# Altium PCB Main Board.PcbDoc (part 2 of 2)
Units mm, origin at the board's own origin, x right, y up, seen from the top; angles counter-clockwise.
Board outline 100 x 75.8 mm, 4 copper layers (Top Layer, L1, L2, Bottom Layer), stack 1.743 mm thick; 166 components, 146 nets, 691 pads, 603 vias.
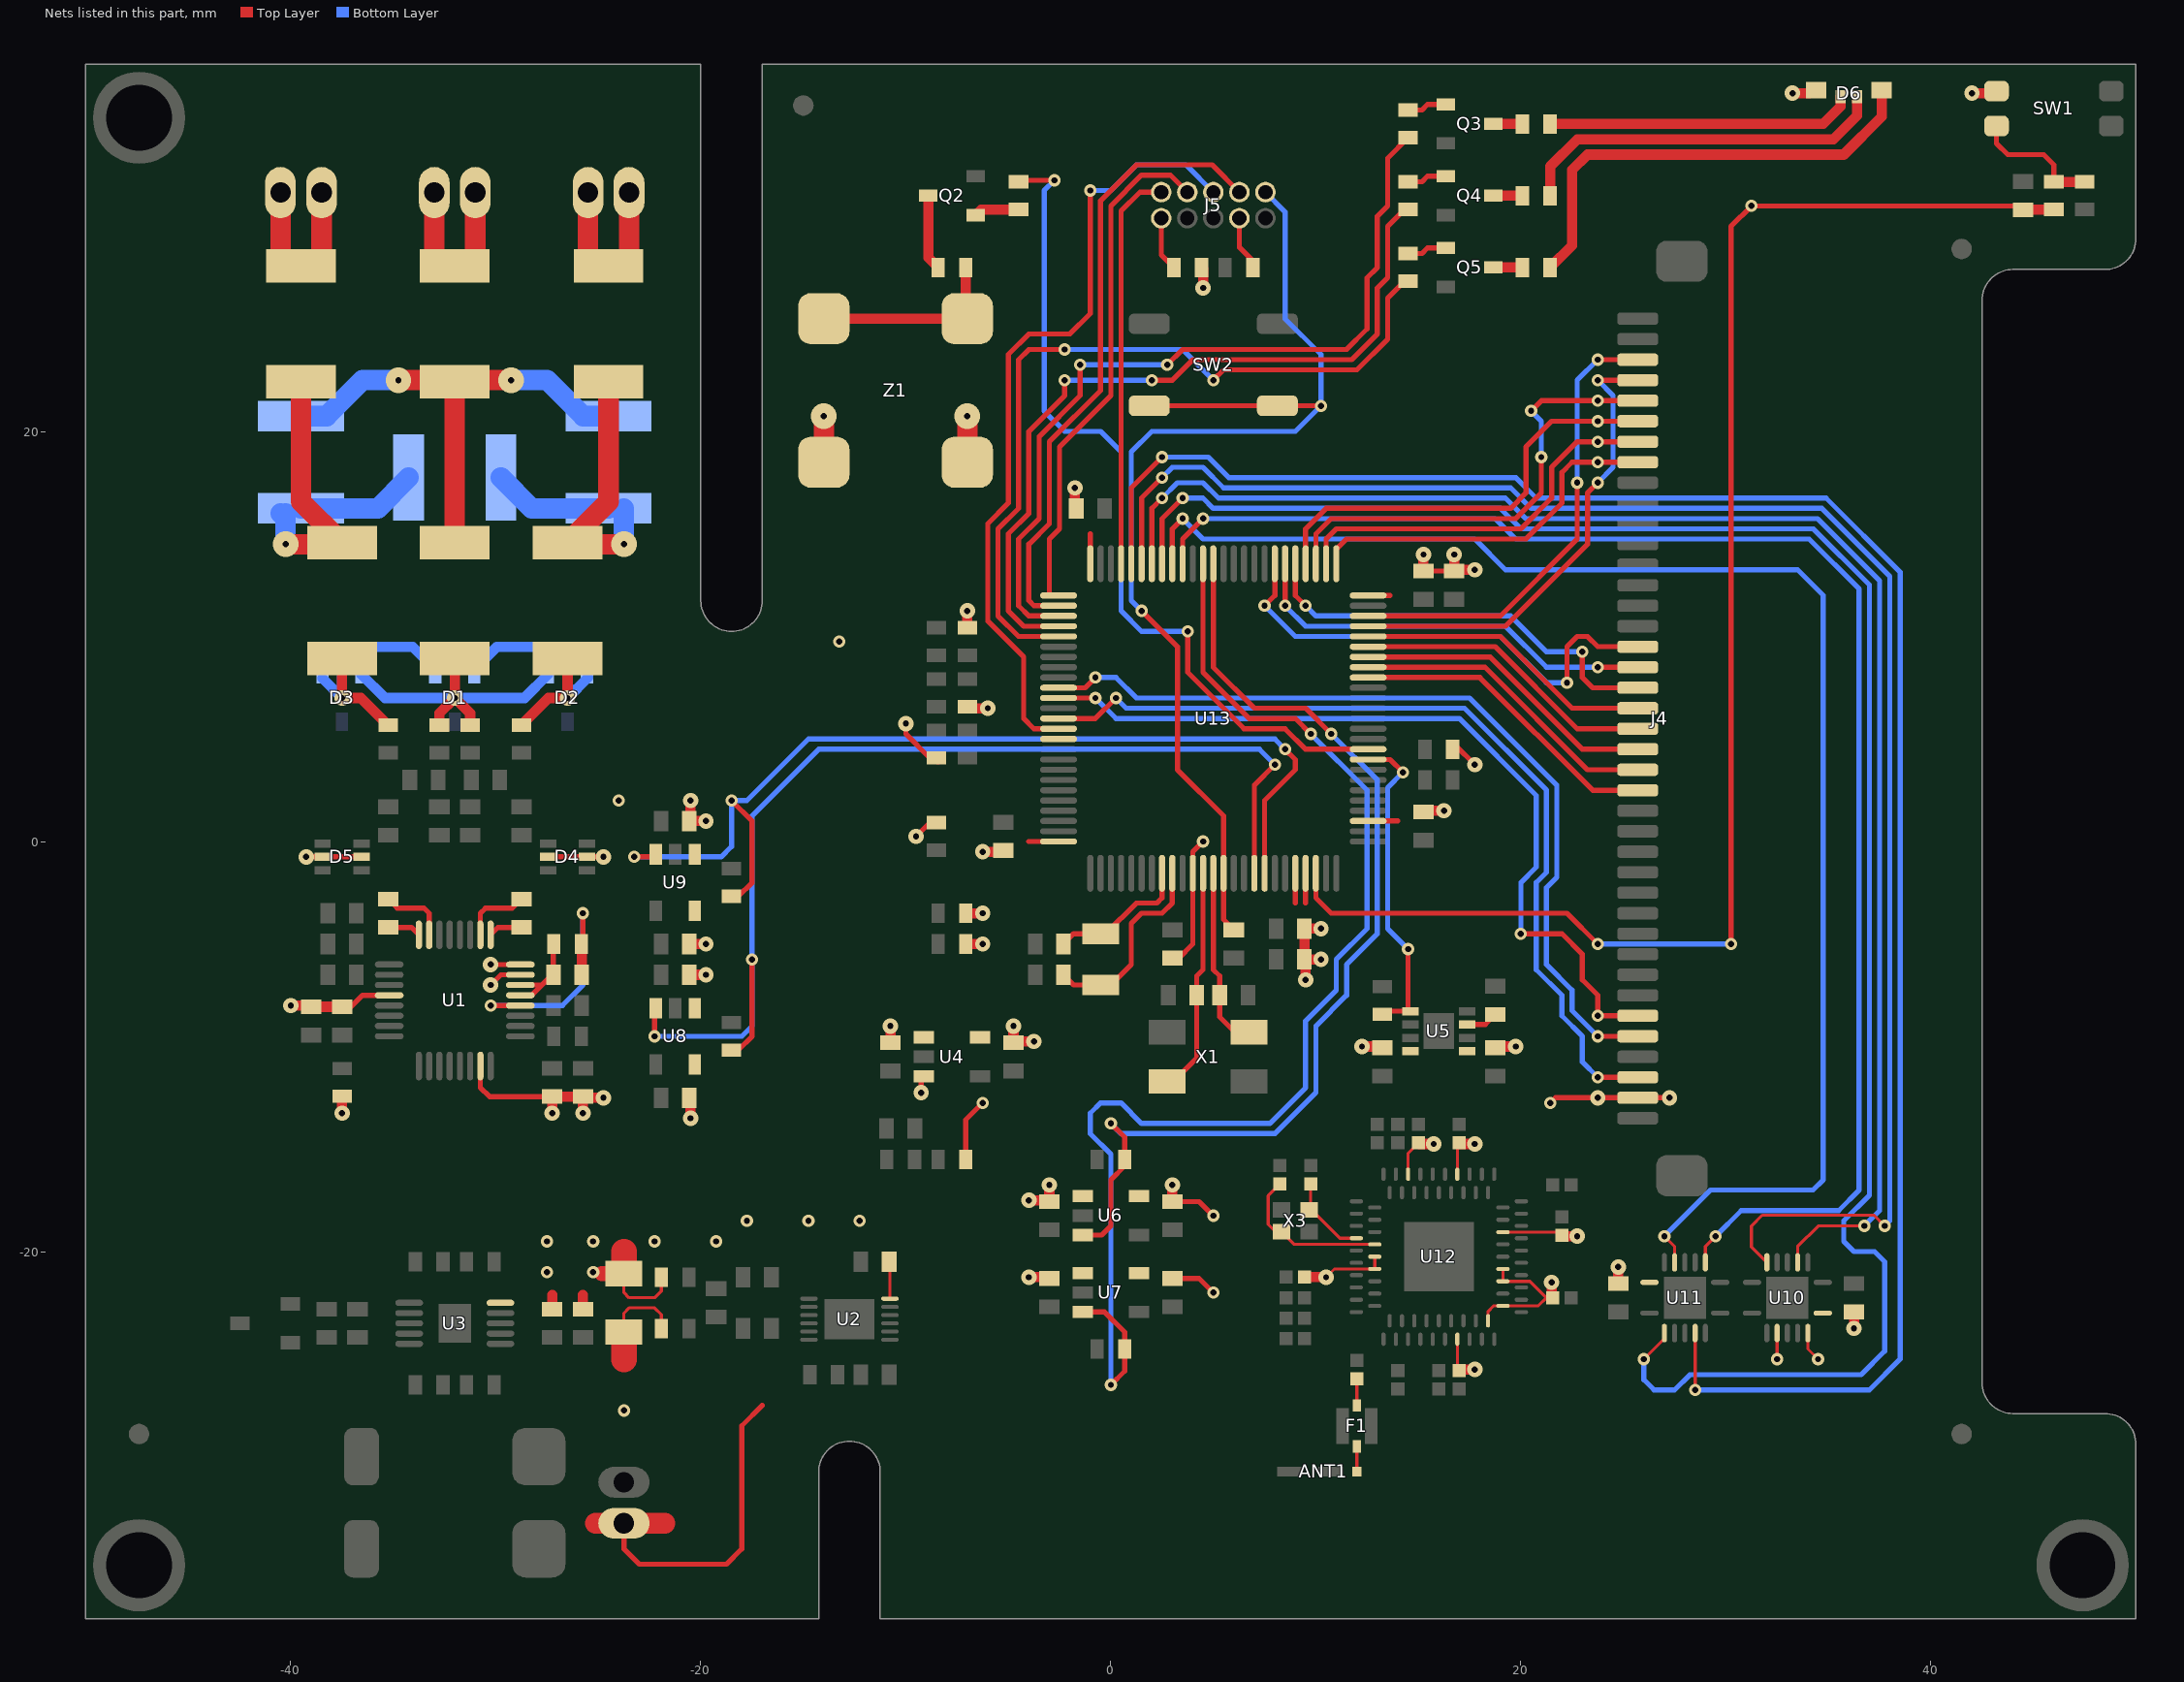
[diagram p4: the nets of this part, all layers, seen from the top]

## Via types
v1: diameter 0.6, hole 0.3, Top Layer to Bottom Layer, tented both sides, 307 vias
v2: diameter 0.75, hole 0.3, Top Layer to Bottom Layer, tented both sides, 137 vias
v3: diameter 0.6, hole 0.3, Top Layer to Bottom Layer, 105 vias
v4: diameter 0.6, hole 0.3, Top Layer to Bottom Layer, tented top, 40 vias
v5: diameter 1.25, hole 0.3, Top Layer to Bottom Layer, 4 vias
v6: diameter 0.75, hole 0.3, Top Layer to Bottom Layer, 3 vias
v7: diameter 1, hole 1, Top Layer to Bottom Layer, 2 vias
v8: diameter 0.75, hole 0.75, Top Layer to Bottom Layer, 2 vias
v9: diameter 1.25, hole 0.3, Top Layer to Bottom Layer, tented both sides, 2 vias
v10: diameter 0.6, hole 0.3, Top Layer to Bottom Layer, tented bottom, 1 vias

## Nets (pads, with @x,y where several pads share a name; then routed paths per layer and width w, separated by ;. In a path a pad name is that pad's centre, name@x,y a point inside that pad or via, vN(x,y) a via of type N, cw(c..) or ccw(c..) an arc to the next point about the centre after c; other vN are vias at no path point) (continued)
FSMC_D8: J4.24 U13.42 | length 15.4
  Top Layer w0.25: U13.42@12.55,8 18,8 23.5,2.5 J4.24@25.7,2.5
FSMC_D9: J4.23 U13.43 | length 15.2
  Top Layer w0.25: U13.43@12.55,8.5 18.25,8.5 23.25,3.5 J4.23@25.7,3.5
FSMC_D10: J4.22 U13.44 | length 15
  Top Layer w0.25: U13.44@12.55,9 18.5,9 23,4.5 J4.22@25.7,4.5
FSMC_D11: J4.21 U13.45 | length 14.8
  Top Layer w0.25: U13.45@12.55,9.5 18.75,9.5 22.75,5.5 J4.21@25.7,5.5
FSMC_D12: J4.20 U13.46 | length 14.6
  Top Layer w0.25: U13.46@12.55,10 19,10 22.5,6.5 J4.20@25.7,6.5
FSMC_D13: J4.19 U13.55 | length 20.8
  Top Layer w0.25: U13.55@9,13.55 9,12 v4(9.5,11.5) ; v3(23,9.25) 23,8 23.5,7.5 J4.19@25.7,7.5
  Bottom Layer w0.25: v4(9.5,11.5) 10,11 19.5,11 21.25,9.25 v3(23,9.25)
FSMC_D14: J4.18 U13.56 | length 20.5
  Top Layer w0.25: v4(8.5,11.5) U13.56@8.5,13.55 ; v3(23.75,8.5) J4.18@25.7,8.5
  Bottom Layer w0.25: v4(8.5,11.5) 9.5,10.5 19.25,10.5 21.25,8.5 v3(23.75,8.5)
FSMC_D15: J4.17 U13.57 | length 24.2
  Top Layer w0.25: v4(7.5,11.5) 8,12 U13.57@8,13.55 ; v3(22.25,7.75) 22.25,9.5 22.75,10 23.25,10 23.75,9.5 J4.17@25.7,9.5
  Bottom Layer w0.25: v4(7.5,11.5) 9,10 19,10 21.25,7.75 v3(22.25,7.75)
FSMC_NE1: J4.38 U13.88 | length 43.5
  Top Layer w0.25: U13.88@-2.55,6 -0.75,6 v4(0.25,7) ; v3(23.75,-11.5) J4.38@25.7,-11.5
  Bottom Layer w0.25: v4(0.25,7) 0.75,6.5 17.25,6.5 21.25,2.5 21.25,-1.5 20.75,-2 20.75,-6.25 22,-7.5 22,-8.5 23,-9.5 23,-10.75 v3(23.75,-11.5)
FSMC_NOE: J4.36 U13.85 | length 42.1
  Top Layer w0.25: U13.85@-2.55,7.5 -1.25,7.5 v4(-0.75,8) ; v3(23.75,-9.5) J4.36@25.7,-9.5
  Bottom Layer w0.25: v4(-0.75,8) 0.25,8 1.25,7 17.5,7 21.75,2.75 21.75,-1.75 21.25,-2.25 21.25,-6 22.5,-7.25 22.5,-8.25 v3(23.75,-9.5)
FSMC_NWE: J4.35 U13.86 | length 41
  Top Layer w0.25: U13.86@-2.55,7 v4(-0.75,7) ; v1(20,-4.5) 22,-4.5 23,-5.5 23,-6.75 23.75,-7.5 v3(23.75,-8.5) J4.35@25.7,-8.5
  Bottom Layer w0.25: v4(-0.75,7) 0.25,6 17,6 20.75,2.25 20.75,-1.25 20,-2 v1(20,-4.5)
HCI_CTS: U11.5 U13.71 | length 95.9
  Top Layer w0.15: v3(28.5,-26.75) U11.5@28.5,-23.975
  Top Layer w0.25: U13.71@1,13.55 1,17.25 v3(2.5,18.75)
  Bottom Layer w0.25: v3(2.5,18.75) 4.75,18.75 5.75,17.75 19.75,17.75 20.75,16.75 34.889,16.75 38.5,13.139 38.5,-25.25 37,-26.75 v3(28.5,-26.75)
HCI_RTS: U10.6 U13.70 | length 83.3
  Top Layer w0.15: U10.6@32,-20.525 31.25,-19.775 31.25,-18.75 31.775,-18.225 37.225,-18.225 v3(37.75,-18.75)
  Top Layer w0.25: U13.70@1.5,13.55 1.5,16.75 v3(2.5,17.75)
  Bottom Layer w0.25: v3(2.5,17.75) 3,18.25 4.5,18.25 5.5,17.25 19.5,17.25 20.5,16.25 34.682,16.25 38,12.932 38,-18.5 v3(37.75,-18.75)
HCI_RX: U11.2 U13.68 | length 93.6
  Top Layer w0.15: v3(26,-25.25) 27,-24.25 U11.2@27,-23.975
  Top Layer w0.25: U13.68@2.5,13.55 2.5,15.75 v3(3.5,16.75)
  Bottom Layer w0.25: v3(3.5,16.75) 4.5,16.75 5,16.25 19,16.25 20,15.25 34.268,15.25 37,12.518 37,-17.25 35.75,-18.5 35.75,-19.5 36.25,-20 37.25,-20 37.75,-20.5 37.75,-24.853 36.603,-26 28.25,-26 27.5,-26.75 26.5,-26.75 26,-26.25 v3(26,-25.25)
HCI_TX: U10.3 U13.69 | length 76.9
  Top Layer w0.15: U10.3@33.5,-20.525 33.5,-19.75 34.5,-18.75 v3(36.75,-18.75)
  Top Layer w0.25: U13.69@2,13.55 2,16.25 v3(2.5,16.75)
  Bottom Layer w0.25: v3(2.5,16.75) 3.25,17.5 4.5,17.5 5.25,16.75 19.25,16.75 20.25,15.75 34.475,15.75 37.5,12.725 37.5,-18 v3(36.75,-18.75)
JTCK: J5.4 U13.76 | length 25.4
  Top Layer w0.25: U13.76@-2.55,12 -3,12 -3,14.75 -2.5,15.25 -2.5,19.25 0,21.75 0,31 1.5,32.5 2.9,32.5 J5.4@3.73,31.67
JTDI: J5.8 U13.77 | length 30.5
  Top Layer w0.25: U13.77@-2.55,11.5 -3.75,11.5 -4,11.75 -4,14.5 -3,15.5 -3,19.5 -0.5,22 -0.5,31.25 1.25,33 4.94,33 J5.8@6.27,31.67
JTDO: J5.6 U13.89 | length 38.7
  Top Layer w0.25: U13.89@-2.55,5.5 -3.75,5.5 -4.25,6 -4.25,9 -6,10.75 -6,15.5 -5,16.5 -5,23.75 -4,24.75 -2,24.75 -1,25.75 v3(-1,31.75)
  Bottom Layer w0.25: v3(-1,31.75) 0,31.75 1.25,33 3.67,33 J5.6@5,31.67
JTMS: J5.2 U13.72 | length 19.5
  Top Layer w0.25: U13.72@0.5,13.55 0.5,30.75 1.42,31.67 J5.2@2.46,31.67
LA: JE1.1 JE1.2 R1.1 | length 7.3
  Top Layer w1: R1.1@-25.5,28 JE1.2@-25.5,31.65 ; R1.1@-23.5,28 JE1.1@-23.5,31.65
LL: JE3.1 JE3.2 R3.1 | length 7.3
  Top Layer w1: R3.1@-40.5,28 JE3.2@-40.5,31.65 ; R3.1@-38.5,28 JE3.1@-38.5,31.65
NetANT1_1: ANT1.1 F1.2 | length 1.3
  Top Layer w0.15: ANT1.1@12,-30.75 F1.2@12,-29.5
NetC7_2: C7.2 R11.1 U1.28 | length 12.9
  Top Layer w0.25: v4(-30.25,-8) U1.28@-28.8,-8 ; R11.1@-25.825,-5 -25.75,-4.925 v3(-25.75,-3.5)
  Top Layer w0.5: C7.2@-25.81,-6.5 R11.1@-25.81,-5.015
  Bottom Layer w0.25: v4(-30.25,-8) -26.75,-8 -25.75,-7 v3(-25.75,-3.5)
NetC8_1: C8.1 U1.2 | length 3.3
  Top Layer w0.25: U1.2@-30.75,-4.55 -30.75,-3.5 -30.5,-3.25 -29.19,-3.25 C8.1@-28.75,-2.81
NetC8_2: C8.2 U1.1 | length 1.6
  Top Layer w0.25: U1.1@-30.25,-4.55 -29.89,-4.19 C8.2@-28.75,-4.19
NetC9_1: C9.1 U1.8 | length 1.6
  Top Layer w0.25: C9.1@-35.25,-4.19 -34.11,-4.19 U1.8@-33.75,-4.55
NetC9_2: C9.2 U1.7 | length 3.3
  Top Layer w0.25: C9.2@-35.25,-2.81 -34.81,-3.25 -33.5,-3.25 -33.25,-3.5 U1.7@-33.25,-4.55
NetC31_2: C31.2 U5.3 | length 1.6
  Top Layer w0.25: U5.3@17.39,-8.925 18.265,-8.925 C31.2@18.75,-8.44
NetC43_2: C43.2 U12.A4 X3.1 | length 4.2
  Top Layer w0.15: C43.2@9.75,-16.7 9.75,-17.9 X3.1@9.675,-17.975 9.8,-17.975 11.175,-19.35 U12.A4@11.975,-19.35
NetC44_2: C44.2 U12.B4 X3.3 | length 7.8
  Top Layer w0.15: C44.2@8.25,-16.7 7.675,-17.275 7.675,-18.675 8.025,-19.025 X3.3@8.325,-19.025 8.95,-19.65 11.626,-19.65 12.324,-19.65 U12.B4@12.875,-19.65
NetC45_2: C45.2 F1.4 | length 1.3
  Top Layer w0.15: F1.4@12,-27.5 C45.2@12,-26.2
NetD1_1: D1.1 D3.1 R6.2 R10.1 | length 13
  Top Layer w0.5: R6.2@-37.5,8.925 v6(-37.5,7) -36.575,7 R10.1@-35.25,5.675
  Bottom Layer w0.5: D3.1@-38.45,7.95 v6(-37.5,7) -37.5,8.75 ; -37.5,9 -37,9.5 -34.05,9.5 D1.1@-32.95,8.4
NetD1_2: D1.2 D2.2 R4.2 R7.1 | length 13.1
  Top Layer w0.5: R7.1@-28.75,5.675 -27.425,7 v6(-26.5,7) R4.2@-26.5,8.925
  Bottom Layer w0.5: D1.2@-31.05,8.4 -29.95,9.5 -27,9.5 -26.5,9 ; -26.5,8.75 v6(-26.5,7) D2.2@-25.5,8
NetD2_1: D2.1 D3.2 R5.2 R8.1 R9.1 | length 15.2
  Top Layer w0.5: R9.1@-32.75,5.675 -32.75,6.25 v6(-32,7) ; R5.2@-32,8.925 v6(-32,7) ; R8.1@-31.25,5.675 -31.25,6.25 v6(-32,7)
  Bottom Layer w0.5: D3.2@-36.55,8.15 -35.4,7 v6(-32,7) -28.6,7 D2.1@-27.45,8.15
NetD6_1: D6.1 R39.2 | length 15
  Top Layer w0.5: R39.2@21.425,35 34.75,35 35.6,35.85 D6.1@35.6,36.325
NetD6_2: D6.2 R41.1 | length 18.4
  Top Layer w0.5: R41.1@21.425,31.5 21.425,32.925 22.75,34.25 35.25,34.25 36.4,35.4 D6.2@36.4,36.325
NetD6_3: D6.3 R43.2 | length 22.7
  Top Layer w0.5: R43.2@21.425,28 22.5,29.075 22.5,32.75 23.25,33.5 35.75,33.5 37.6,35.35 D6.3@37.6,36.65
NetJ5_1: J5.1 R46.2 | length 2.7
  Top Layer w0.25: J5.1@2.46,30.4 2.46,28.615 R46.2@3.075,28
NetJ5_7: J5.7 R47.2 | length 2.3
  Top Layer w0.25: J5.7@6.27,30.4 6.27,28.98 R47.2@6.925,28.325
NetN1_1: N1.1 N3.1 R3.2 R6.1 | length 19.1
  Top Layer w1: v5(-40.25,14.5) R6.1@-37.575,14.5 ; R3.2@-39.5,22.425 -39.5,16.575 R6.1@-37.5,14.575
  Bottom Layer w1: N3.1@-40.5,16 N3.1@-40.25,15.75 ; v5(-40.25,14.5) N3.1@-40.25,15.75 ; N3.1@-40.25,16 N3.1@-40.25,15.75 ; N3.1@-39.5,16.25 -35.75,16.25 N1.1@-34.25,17.75
NetN1_2: N1.2 N2.2 R1.2 R4.1 | length 19.1
  Top Layer w1: R1.2@-24.5,22.425 -24.5,16.575 R4.1@-26.5,14.575 -26.425,14.5 v5(-23.75,14.5)
  Bottom Layer w1: N1.2@-29.75,17.75 -28.25,16.25 N2.2@-24.5,16.25 ; v5(-23.75,14.5) N2.2@-23.75,16.25
NetN2_1: N2.1 N3.2 R2.2 R5.1 | length 24.4
  Top Layer w1: v5(-34.75,22.5) -32.075,22.5 R2.2@-32,22.425 ; R5.1@-32,14.575 R2.2@-32,22.425 ; v5(-29.25,22.5) -31.925,22.5 R2.2@-32,22.425
  Bottom Layer w1: N3.2@-39.5,20.75 -38.25,20.75 -36.5,22.5 v5(-34.75,22.5) ; v5(-29.25,22.5) -27.5,22.5 -25.75,20.75 N2.1@-24.5,20.75
NetQ2_1: Q2.1 R36.2 | length 2.2
  Top Layer w0.5: Q2.1@-6.6,30.55 -6.325,30.825 R36.2@-4.5,30.825
NetQ2_3: Q2.3 R37.2 | length 3.7
  Top Layer w0.5: Q2.3@-8.9,31.5 -8.9,28.475 R37.2@-8.425,28
NetQ3_1: Q3.1 R38.2 | length 2
  Top Layer w0.25: R38.2@14.5,35.675 15.175,35.675 15.45,35.95 Q3.1@16.35,35.95
NetQ3_3: Q3.3 R39.1 | length 1.4
  Top Layer w0.5: Q3.3@18.65,35 R39.1@20.075,35
NetQ4_1: Q4.1 R40.2 | length 2
  Top Layer w0.25: R40.2@14.5,32.175 15.175,32.175 15.45,32.45 Q4.1@16.35,32.45
NetQ4_3: Q4.3 R41.2 | length 1.4
  Top Layer w0.5: Q4.3@18.65,31.5 R41.2@20.075,31.5
NetQ5_1: Q5.1 R42.1 | length 2
  Top Layer w0.25: R42.1@14.5,28.675 15.175,28.675 15.45,28.95 Q5.1@16.35,28.95
NetQ5_3: Q5.3 R43.1 | length 1.4
  Top Layer w0.5: Q5.3@18.65,28 R43.1@20.075,28
NetR37_1: R37.1 Z1.2 | length 9.5
  Top Layer w0.5: Z1.2@-14,25.5 Z1.2@-7,25.5 -7.075,25.575 R37.1@-7.075,28
NetR44_2: R44.2 R45.1 SW1.1 | length 6.4
  Top Layer w0.25: SW1.1@43.2,34.9 43.2,34.05 43.75,33.5 45.5,33.5 46,33 R45.1@46,32.175
  Top Layer w0.5: R45.1@46,32.175 R44.2@47.5,32.175
NJTRST: U13.90
NRST: C63.2 J5.10 SW2.3 SW2.4 U13.14 | length 55.5
  Top Layer w0.25: v4(1.5,11.25) 3.25,9.5 3.25,3.5 5.5,1.25 U13.14@5.5,-1.55 5.5,-3.81 C63.2@6,-4.31 ; SW2.3@1.875,21.25 SW2.4@8.125,21.25 v3(10.25,21.25)
  Bottom Layer w0.25: v4(1.5,11.25) 1,11.75 1,19 2,20 9,20 v3(10.25,21.25) 10.25,23.75 8.5,25.5 8.5,30.71 J5.10@7.54,31.67
NSHUTD: U11.9 U13.66 | length 74.8
  Top Layer w0.15: U11.9@29,-20.525 29,-19.75 v3(29.5,-19.25)
  Top Layer w0.25: U13.66@3.5,13.55 3.5,14.75 v3(4.5,15.75)
  Bottom Layer w0.25: v3(4.5,15.75) 18.75,15.75 19.75,14.75 34.061,14.75 36.5,12.311 36.5,-17 35.5,-18 30.75,-18 v3(29.5,-19.25)
PACK+: C18.2 J2.1 R14.1 R15.1 U2.6 | length 25.2
  Top Layer w0.15: R14.1@-23.75,-23.925 -23.75,-23 -23.5,-22.75 -22.25,-22.75 -21.925,-23.075 R15.1@-21.925,-23.75 ; C18.2@-10.81,-20.5 -10.775,-20.535 U2.6@-10.775,-22.3
  Top Layer w0.25: J2.1@-23.75,-33.25 -23.75,-34.5 -23,-35.25 -18.75,-35.25 -18,-34.5 -18,-28.5 -17,-27.5
  Top Layer w1: -25.141,-33.25 J2.1@-23.75,-33.25 -21.75,-33.25
  Top Layer w1.25: -23.75,-25.25 R14.1@-23.75,-23.925
  other v3: -23.75,-27.75
RA: JE2.1 JE2.2 R2.1 | length 7.3
  Top Layer w1: R2.1@-33,28 JE2.2@-33,31.65 ; R2.1@-31,28 JE2.1@-31,31.65
SHIELD: C7.1 R11.2 U1.29 U1.30 | length 4.6
  Top Layer w0.25: U1.29@-28.8,-7.5 -28.25,-7.5 -27.75,-7 ; U1.30@-28.8,-7 -27.75,-7 ; R11.2@-27.175,-5 -27.19,-5.015 C7.1@-27.19,-6.5 -27.25,-6.5 -27.75,-7
SLOW_CLK: U11.12 U13.67 | length 74.1
  Top Layer w0.15: v3(27,-19.25) 27.5,-19.75 U11.12@27.5,-20.525
  Top Layer w0.25: U13.67@3,13.55 3,15.25 v3(3.5,15.75)
  Bottom Layer w0.25: v3(3.5,15.75) 4.5,14.75 17.75,14.75 19.25,13.25 33.5,13.25 34.75,12 34.75,-16.5 34.25,-17 29.25,-17 v3(27,-19.25)
TP_BUSY: J4.4 U13.47 | length 23.1
  Top Layer w0.25: U13.47@12.55,10.5 19.25,10.5 23.25,14.5 23.25,17 v3(23.75,17.5) ; v3(23.75,22.5) J4.4@25.7,22.5
  Bottom Layer w0.25: v3(23.75,17.5) 24.5,18.25 24.5,21.75 v3(23.75,22.5)
TP_CS: J4.8 U13.51 | length 18
  Top Layer w0.25: U13.51@11,13.55 11,14.25 11.5,14.75 20.25,14.75 22,16.5 22,18 22.5,18.5 v3(23.75,18.5) J4.8@25.7,18.5
TP_MISO: J4.5 U13.53 | length 22.9
  Top Layer w0.25: U13.53@10,13.55 10,15 10.75,15.75 19.75,15.75 21,17 v4(21,18.75) ; v4(20.5,21) 21,21.5 v3(23.75,21.5) J4.5@25.7,21.5
  Bottom Layer w0.25: v4(20.5,21) 21,20.5 v4(21,18.75)
TP_MOSI: J4.6 U13.54 | length 21.4
  Top Layer w0.25: U13.54@9.5,13.55 9.5,15.25 10.5,16.25 19.5,16.25 20.25,17 20.25,19.25 21.5,20.5 v3(23.75,20.5) J4.6@25.7,20.5
TP_PEN: J4.3 U13.48 | length 22.9
  Top Layer w0.25: U13.48@12.55,11 19,11 22.75,14.75 v3(22.75,17.5) ; v3(23.75,23.5) J4.3@25.7,23.5
  Bottom Layer w0.25: v3(22.75,17.5) 22.75,22.5 v3(23.75,23.5)
TP_SCLK: J4.7 U13.52 | length 19.2
  Top Layer w0.25: U13.52@10.5,13.55 10.5,14.75 11,15.25 20,15.25 21.5,16.75 21.5,18.25 22.75,19.5 v3(23.75,19.5) J4.7@25.7,19.5
UI_BUZZER: R36.1 U13.35 | length 41.6
  Top Layer w0.25: R36.1@-4.5,32.175 -4.5,32.25 v3(-2.75,32.25) ; v4(3.75,10.25) 3.75,8.25 6.5,5.5 8.5,5.5 9.5,4.5 U13.35@12.55,4.5
  Bottom Layer w0.25: v3(-2.75,32.25) -3.25,31.75 -3.25,21 -2.25,20 -0.5,20 0.5,19 0.5,11.25 1.5,10.25 v4(3.75,10.25)
UI_LED_B: R42.2 U13.80 | length 39.3
  Top Layer w0.25: U13.80@-2.55,10 -4.5,10 -5.5,11 -5.5,15.25 -4.5,16.25 -4.5,23.5 -4,24 v3(-2.25,24) ; v4(5,22.5) 5.5,23 12,23 13.5,24.5 13.5,26.5 14.325,27.325 R42.2@14.5,27.325
  Bottom Layer w0.25: v3(-2.25,24) 3.5,24 v4(5,22.5)
UI_LED_G: R40.1 U13.79 | length 38
  Top Layer w0.25: U13.79@-2.55,10.5 -4.25,10.5 -5,11.25 -5,15 -4,16 -4,20 -2.25,21.75 v3(-2.25,22.5) ; v4(2,22.5) 3,22.5 4,23.5 11.75,23.5 13,24.75 13,27 13.5,27.5 13.5,30 R40.1@14.325,30.825
  Bottom Layer w0.25: v3(-2.25,22.5) v4(2,22.5)
UI_LED_R: R38.1 U13.78 | length 40
  Top Layer w0.25: U13.78@-2.55,11 -4,11 -4.5,11.5 -4.5,14.75 -3.5,15.75 -3.5,19.75 -1.5,21.75 v3(-1.5,23.25) ; v4(2.75,23.25) 3.5,24 11.5,24 12.5,25 12.5,27.5 13,28 13,30.5 13.5,31 13.5,33.325 R38.1@14.5,34.325
  Bottom Layer w0.25: v3(-1.5,23.25) v4(2.75,23.25)
VDD_AFE_A: C10.2 C11.2 C40.2 D4.2 D4.5 D5.2 D5.5 U1.12 U1.31 U1.32 U9.5 | length 14.4
  Top Layer w0.25: v2(-39.25,-0.75) D5.5@-38.45,-0.75 D5.2@-36.55,-0.75 ; C11.2@-37.75,-8.06 C11.2@-37.5,-8.06 -37.06,-8.06 -36.5,-7.5 U1.12@-35.2,-7.5 ; v2(-30.25,-7) -29.75,-6.5 U1.31@-28.8,-6.5 ; v2(-30.25,-6) U1.32@-28.8,-6 ; D4.2@-27.45,-0.75 D4.5@-25.55,-0.75 v2(-24.75,-0.75)
  Top Layer w0.5: v2(-40,-8) -39.06,-8 C10.2@-39,-8.06 C11.2@-37.75,-8.06 ; C40.2@-20.56,-5 v2(-19.75,-5)
  other v3: -24,2
VDD_AFE_A_EN: R35.1 U9.3 U13.18 | length 49.3
  Top Layer w0.25: v3(-23.25,-0.75) -22.325,-0.75 U9.3@-22.2,-0.625 ; R35.1@-18.5,-2.675 -18.175,-2.675 -17.5,-2 -17.5,1 v3(-18.5,2) ; U13.18@7.5,-1.55 7.5,2 9,3.5 9,4 v4(8.5,4.5)
  Bottom Layer w0.25: v3(-23.25,-0.75) -19,-0.75 -18.5,-0.25 v3(-18.5,2) -17.75,2 -14.75,5 8,5 v4(8.5,4.5)
VDD_AFE_D: C12.2 C13.2 C38.2 R12.1 U1.23 U8.5 | length 10.8
  Top Layer w0.25: U1.23@-30.75,-10.95 -30.75,-12 -30.31,-12.44 C13.2@-27.25,-12.44
  Top Layer w0.5: v2(-37.5,-13.25) -37.5,-12.575 -37.425,-12.5 R12.1@-37.5,-12.425 ; v2(-27.25,-13.25) C13.2@-27.25,-12.44 C12.2@-25.75,-12.44 ; v2(-25.75,-13.25) C12.2@-25.75,-12.44 ; v2(-24.75,-12.5) -25.69,-12.5 C12.2@-25.75,-12.44 ; C38.2@-20.56,-12.5 -20.5,-12.56 v2(-20.5,-13.5)
VDD_AFE_D_EN: R34.1 U8.3 U13.17 | length 54.6
  Top Layer w0.25: v4(-22.25,-9.5) -22.25,-8.075 U8.3@-22.2,-8.125 ; R34.1@-18.5,-10.175 -18.175,-10.175 -17.5,-9.5 v3(-17.5,-5.75) ; U13.17@7,-1.55 7,2.75 v4(8,3.75)
  Bottom Layer w0.25: v4(-22.25,-9.5) -18,-9.5 -17.5,-9 v3(-17.5,-5.75) -17.5,1.25 -14.25,4.5 7.25,4.5 v4(8,3.75)
VDD_MCU: C29.2 C41.2 C66.2 C67.2 C68.2 C69.2 C70.2 C71.2 C72.2 C73.2 D6.4 R18.1 R19.1 R20.1 R27.1 R29.1 R30.1 R46.1 R48.2 R50.2 SW1.2 U4.5 U10.10 U10.13 U10.14 U13.11 U13.21 U13.22 U13.28 U13.50 U13.75 U13.100 Z1.1 | length 51.6
  Top Layer w0.15: v1(32.5,-25.25) U10.10@32.5,-23.975 ; U10.13@34,-23.975 34,-24.75 v1(34.5,-25.25)
  Top Layer w0.25: v2(-10,5.75) -10,5.25 -8.825,4.075 R50.2@-8.5,4.075 ; v2(-9.5,0.25) -8.825,0.925 R18.1@-8.5,0.925 ; R27.1@-7.075,-15.5 -7.075,-13.575 v1(-6.25,-12.75) ; -4,0 -3.625,0 U13.100@-2.55,0 ; U13.75@-1,13.55 -1,14.625 -1,15 ; C71.2@3,-5.69 3.31,-5.69 4,-5 U13.11@4,-1.55 4,-0.5 v1(4.5,0) ; 9,-3 U13.21@9,-1.55 ; 9.5,-3 U13.22@9.5,-1.55 ; U13.28@12.55,1 13.625,1 14,1 ; U13.50@12.55,12 13.625,12 ; C66.2@15.25,13.19 C67.2@16.75,13.19 ; R48.2@16.675,4.5 16.837,4.663 v2(17.75,3.75)
  Top Layer w0.5: R50.2@-8.5,4.075 R50.2@-8.425,4 ; R29.1@-7.075,-5 v2(-6.25,-5) ; R30.1@-7.075,-3.5 v2(-6.25,-3.5) ; R19.1@-7,6.575 -6.925,6.5 v2(-6,6.5) ; R20.1@-7,10.425 v2(-7,11.25) ; v2(-6.25,-0.5) -5.31,-0.5 C69.2@-5.25,-0.44 ; v2(-4.75,-9) C29.2@-4.75,-9.81 -4.69,-9.75 v2(-3.75,-9.75) ; C68.2@-1.75,16.31 v2(-1.75,17.25) ; R46.1@4.425,28 4.5,27.925 v2(4.5,27) ; v2(9.5,-6.75) 9.5,-5.81 C72.2@9.44,-5.75 ; v2(10.25,-5.75) C72.2@9.44,-5.75 ; v2(10.25,-4.25) C73.2@9.44,-4.25 C72.2@9.44,-5.75 ; C70.2@15.25,1.44 15.31,1.5 v2(16.25,1.5) ; C66.2@15.25,13.19 v2(15.25,14) ; v2(16.75,14) C67.2@16.75,13.19 16.81,13.25 v2(17.75,13.25) ; v2(33.25,36.5) 34.05,36.5 34.3,36.75 D6.4@34.4,36.65 ; v2(36.25,-23.75) C41.2@36.25,-22.94 ; v2(42,36.5) 43.1,36.5 SW1.2@43.2,36.6
  Top Layer w1: Z1.1@-14,18.5 v9(-14,20.75) ; Z1.1@-7,18.5 v9(-7,20.75)
  other v3: -13.25,9.75
VDD_RF_IO: C36.2 C42.2 C47.2 C48.2 C49.2 C50.2 C51.2 U7.5 U11.14 U12.A17 U12.A34 U12.A38 U12.B18 U12.B19 U12.B21 U12.B22 U12.B25 | length 21.2
  Top Layer w0.15: U12.A38@14.5,-16.225 14.5,-15.2 C49.2@15,-14.7 ; C47.2@16.9,-25.7 U12.A17@16.9,-24.275 ; U12.A34@16.9,-16.225 16.9,-14.8 C48.2@16.95,-14.75 ; U12.B18@18.4,-23.375 18.4,-22.921 18.671,-22.65 U12.B19@19.125,-22.65 20.85,-22.65 C50.2@21.25,-22.25 ; U12.B22@19.125,-20.85 U12.B21@19.125,-21.45 20.45,-21.45 C50.2@21.25,-22.25 ; U12.B25@19.125,-19.05 21.85,-19.05 C51.2@22,-19.2 ; C50.2@21.4,-22.1 C50.2@21.25,-22.25
  Top Layer w0.25: C36.2@3,-21.31 4.31,-21.31 v3(5,-22)
  Top Layer w0.5: C49.2@15.05,-14.75 v2(15.75,-14.75) ; C48.2@16.95,-14.75 C48.2@17,-14.7 17.05,-14.75 v2(17.75,-14.75) ; C47.2@17,-25.8 17.05,-25.75 v2(17.75,-25.75) ; C50.2@21.5,-22.2 v2(21.5,-21.5) ; C51.2@22.05,-19.25 v2(22.75,-19.25) ; C42.2@24.75,-21.56 v2(24.75,-20.75)
VDD_RF_IO_EN: R33.1 U7.3 U13.64 | length 62.2
  Top Layer w0.25: U7.3@-1.375,-22.95 -0.3,-22.95 0.675,-23.925 R33.1@0.675,-24.75 0.675,-25.825 v3(0,-26.5) ; U13.64@4.5,13.55 4.5,8.25 6.75,6 9,6 v4(9.75,5.25)
  Bottom Layer w0.25: v3(0,-26.5) 0,-15.25 -1,-14.25 -1,-13.25 -0.5,-12.75 0.5,-12.75 1.5,-13.75 7.75,-13.75 9.5,-12 9.5,-8.75 11,-7.25 11,-5.75 12.5,-4.25 12.5,2.5 v4(9.75,5.25)
VDD_RF_PW: C34.2 C46.2 U6.5 U12.B5 U12.B6 | length 7.3
  Top Layer w0.15: v2(10.5,-21.25) 10.9,-20.85 U12.B6@12.875,-20.85 U12.B5@12.875,-20.25
  Top Layer w0.25: C34.2@3,-17.56 4.31,-17.56 v3(5,-18.25)
  Top Layer w0.5: C34.2@3,-17.56 v2(3,-16.75) ; C46.2@9.45,-21.25 v2(10.5,-21.25)
VDD_RF_PW_EN: R32.1 U6.3 U13.63 | length 50
  Top Layer w0.25: U6.3@-1.325,-19.25 U6.3@-1.375,-19.2 -0.45,-19.2 0,-18.75 0,-16.5 0.675,-15.825 R32.1@0.675,-15.5 0.675,-14.425 v3(0,-13.75) ; U13.63@5,13.55 5,8.5 7,6.5 9.5,6.5 v4(10.75,5.25)
  Bottom Layer w0.25: v3(0,-13.75) 0.5,-14.25 8,-14.25 10,-12.25 10,-9 11.5,-7.5 11.5,-6 13,-4.5 13,3 v4(10.75,5.25)
VDD_SCREEN: C32.2 J4.39 U5.1 | length 6.9
  Top Layer w0.25: v3(21.438,-12.75) 21.688,-12.5 v2(23.75,-12.5) J4.39@25.7,-12.5 v2(27.25,-12.5)
  Top Layer w0.5: C32.2@18.75,-10.06 18.81,-10 v2(19.75,-10)
VDD_SCREEN_EN: R31.1 U5.5 U13.34 | length 15.8
  Top Layer w0.25: U13.34@12.55,4 13.625,4 v3(14.25,3.375) ; R31.1@13.25,-8.425 13.4,-8.275 U5.5@14.61,-8.275 14.5,-8.165 v3(14.5,-5.25)
  Bottom Layer w0.25: v3(14.25,3.375) 13.5,2.625 13.5,-4.25 v3(14.5,-5.25)
VSYS: C25.2 C26.2 C28.2 C30.2 C33.2 C35.2 C37.2 C39.2 R14.2 R16.1 U3.10 U4.1 U4.3 U5.8 U6.1 U7.1 U8.1 U9.1 | length 15.4
  Top Layer w0.15: R14.2@-23.75,-21.075 -23.75,-22 -23.5,-22.25 -22.25,-22.25 -21.925,-21.925 R16.1@-21.925,-21.25
  Top Layer w0.25: v2(-9.25,-12.25) -9.25,-11.575 U4.3@-9.125,-11.45
  Top Layer w0.5: C25.2@-27.25,-22.81 -27.25,-22.125 ; C26.2@-25.75,-22.81 -25.75,-22.125 ; C37.2@-20.56,-6.5 v2(-19.75,-6.5) ; v2(-20.5,2) -20.5,1.06 C39.2@-20.56,1 v2(-19.75,1) ; C28.2@-10.75,-9.81 v2(-10.75,-9) ; v2(-4,-21.25) -3.06,-21.25 C35.2@-3,-21.31 ; v2(-4,-17.5) -3.06,-17.5 C33.2@-3,-17.56 v2(-3,-16.75) ; v2(12.25,-10) 13.19,-10 C30.2@13.25,-10.06
  Top Layer w0.75: -24.825,-21.075 R14.2@-23.75,-21.075
  Top Layer w1.25: R14.2@-23.75,-21.075 -23.75,-20
  other v1: -27.5,-21 -25.25,-21 -27.5,-19.5 -25.25,-19.5 -22.25,-19.5 -19.25,-19.5 -17.75,-18.5 -14.75,-18.5 -12.25,-18.5
WAKEUP: C60.2 R45.2 U13.23 | length 73.6
  Top Layer w0.25: U13.23@10,-1.55 10,-2.736 10.025,-2.761 10.025,-2.775 10.75,-3.5 22.25,-3.5 v3(23.75,-5) ; v4(30.25,-5) 30.25,30 v10(31.25,31) 44.31,31 C60.2@44.5,30.81
  Top Layer w0.5: C60.2@44.515,30.825 R45.2@46,30.825
  Bottom Layer w0.25: v3(23.75,-5) v4(30.25,-5)
X1_N: C64.2 U13.13 X1.1 | length 8.9
  Top Layer w0.25: U13.13@5,-1.55 5,-6.25 5.31,-6.56 C64.2@5.31,-7.5 5.31,-8.56 6.05,-9.3 X1.1@6.75,-9.3
X1_P: C65.2 U13.12 X1.3 | length 11.1
  Top Layer w0.25: X1.3@2.75,-11.7 3.05,-11.7 4.19,-10.56 C65.2@4.19,-7.5 4.19,-6.56 4.5,-6.25 U13.12@4.5,-1.55
X2_N: C62.2 U13.9 X2.1 | length 9.3
  Top Layer w0.25: C62.2@-2.31,-6.5 -1.81,-7 X2.1@-0.5,-7 ; X2.1@0,-7 1,-6 1,-4 1.5,-3.5 2.5,-3.5 3,-3 U13.9@3,-1.55
X2_P: C61.2 U13.8 X2.2 | length 6.9
  Top Layer w0.25: C61.2@-2.31,-5 -1.81,-4.5 X2.2@-0.5,-4.5 -0.25,-4.5 1.25,-3 2.25,-3 2.5,-2.75 U13.8@2.5,-1.55
pads on no net: D1.3 D2.3 D3.3 J4. J4.33 J4.34 SW1.3 SW1.4 U2.4 U2.9 U2.11 U3.6 U4.4 U5.2 U5.6 U5.7 U6.4 U7.4 U8.4 U9.4 U10.8 U10.11 U10.Pad U11.Pad U12.A1 U12.A13 U12.A14 U12.A15 U12.A16 U12.A18 U12.A19 U12.A20 U12.A21 U12.A22 U12.A23 U12.A27 U12.A30 U12.A31 U12.A35 U12.A36 U12.A37 U12.A39 U12.A40 U12.B12 U12.B13 U12.B14 U12.B16 U12.B17 U12.B20 U12.B23 U12.B24 U12.B28 U12.B29 U12.B30 U12.B31 U12.B32 U12.B33 U13.1 U13.6 U13.7 U13.15 U13.16 U13.33 U13.36 U13.60 U13.65 U13.73 U13.83 U13.84 U13.87 U13.91 U13.95 U13.96 U13.97 U13.98
copper on no net:
  other v1: 27.45,-22.8 28.55,-22.8 32.45,-22.8 33.55,-22.8 27.45,-21.7 28.55,-21.7 32.45,-21.7 33.55,-21.7
  other v3: -23.75,-18.75 -29.25,-13.75
  other v7: -32,-36.4 -32,-31.4
  other v8: 46,34.375 46,37.125

## Polygon pours and split planes (outlines as drawn)
AGND on Top Layer "GND_TOP" (solid, pour order 29): 50,-30.5 50,-29.4 ccw(c48.501,-29.4) 48.5,-27.9 44,-27.9 cw(c44,-26.4) 42.5,-26.4 42.5,26.4 cw(c44,26.4) 44,27.9 48.5,27.9 ccw(c48.5,29.4) 50,29.4 50,37.9 -17,37.9 -17,-14.625 -12.5,-14.625 -12.5,-16.875 -9.5,-19.875 -9.5,-21 -9.5,-21.5 -9.25,-21.75 -8.625,-21.75 -8,-22.375 -8,-27.375 -8.625,-28 -11,-28 -11,-30.5
AGND on Top Layer "GND_AFE_TOP" (solid, pour order 28): -17.25,-14.625 -50,-14.625 -50,11.75 -20,11.75 ccw(c-18.5,11.75) -18.5,10.25 ccw(c-18.5,11.75) -17.25,10.921 -17.25,9.5
PACK+ on Top Layer "PACK+_CHRG_TOP" (solid, pour order 25): -25.75,-37.9 -25.75,-32.625 -25.75,-28.75 -24.875,-27.875 -24.875,-23.25 -22.625,-23.25 -22.625,-24.25 -22,-24.875 -18.25,-24.875 -17.5,-25.625 -17.5,-27.5 -18.375,-28.375 -18.375,-30.125 -18.375,-34.375 -18.875,-34.875 -22.875,-34.875 -23.375,-34.375 -23.375,-34 -24.125,-34 -24.125,-34.625 -23.125,-35.625 -18.625,-35.625 -17.625,-34.625 -17.625,-30.375 -17.625,-28.625 -17,-28 -15.25,-28 -11.25,-28 -11.25,-30.75 ccw(c-12.75,-30.75) -12.75,-29.25 ccw(c-12.75,-30.75) -14.25,-30.75 -14.25,-37.9
PACK+ on Top Layer "PACK+_FG_TOP" (solid, pour order 23): -21.25,-20.375 -21.25,-24.625 -18.125,-24.625 -17.25,-25.5 -17.25,-27.5 -17,-27.75 -8.75,-27.75 -8.25,-27.25 -8.25,-22.5 -8.75,-22 -9.375,-22 -9.75,-21.625 -9.75,-20 -10.25,-19.5 -15.5,-19.5 -17.25,-19.5 -18.125,-20.375
VSYS on Top Layer "VSYS_TOP" (solid, pour order 24): -25.125,-23.375 -25.125,-22.25 -24.625,-21.75 -22.625,-21.75 -22.625,-20.75 -22,-20.125 -18.25,-20.125 -17.375,-19.25 -10.5,-19.25 -12.75,-17 -12.75,-14.875 -28.125,-14.875 -28.125,-23.375
AGND on Top Layer "GND_CHRG_TOP" (solid, pour order 27): -41.125,-26 -40.625,-26.5 -36.5,-26.5 -35,-28 -32.5,-28 -31.875,-28.625 -31.875,-37.9 -26,-37.9 -26,-28.625 -25.125,-27.75 -25.125,-26.5 -25.125,-23.625 -27.875,-23.625 -28.375,-23.125 -28.375,-14.875 -50,-14.875 -50,-22 -41.75,-22 -41.125,-22.625
CHRG_JACK on Top Layer "CHRG_JACK_TOP" (solid, pour order 26): -50,-37.9 -32.125,-37.9 -32.125,-37.25 -32.125,-28.75 -32.625,-28.25 -35.125,-28.25 -36.625,-26.75 -40.75,-26.75 -41.375,-26.125 -41.375,-25.25 -41.375,-22.75 -41.875,-22.25 -50,-22.25
AGND on L1 "GND_AFE_L1" (solid, pour order 31): -17.25,-15.125 -19.25,-15.125 -19.25,-14.625 -50,-14.625 -50,11.75 -37.5,11.75 -20,11.75 ccw(c-18.5,11.75) -18.5,10.25 ccw(c-18.5,11.75) -17.25,10.921 -17.25,9.5
AGND on L1 "GND_L1" (solid, pour order 32): -14.25,-37.9 -14.25,-30.75 cw(c-12.746,-30.75) -12.746,-29.246 cw(c-12.746,-30.75) -11.243,-30.75 -11.243,-28 -17,-28 -17.625,-28.625 -17.625,-30.625 -18.625,-31.625 -22.5,-31.625 -22.5,-30.875 -18.875,-30.875 -18.375,-30.375 -18.375,-28.375 -17.5,-27.5 -17.5,-25.625 -18.25,-24.875 -22,-24.875 -22.625,-24.25 -22.625,-20.75 -22,-20.125 -18.125,-20.125 -18.125,-20 -17.375,-19.25 -10.125,-19.25 -9.5,-19.875 -9.5,-21.5 -9.25,-21.75 -8.625,-21.75 -8,-22.375 -8,-27.375 -8.625,-28 -11.243,-28 -11.243,-30.5 50,-30.5 50,-29.4 ccw(c48.5,-29.4) 48.5,-27.9 44,-27.9 cw(c44,-26.4) 42.5,-26.4 42.5,26.4 cw(c44,26.4) 44,27.9 48.5,27.9 ccw(c48.5,29.4) 50,29.4 50,37.9 -17,37.9 -17,-14.875 -50,-14.875 -50,-37.9
AGND on L1 "GND_FG_L1" (solid, pour order 30): -22.375,-20.875 -22.375,-24.125 -21.875,-24.625 -18.125,-24.625 -17.25,-25.5 -17.25,-27.5 -17,-27.75 -8.75,-27.75 -8.25,-27.25 -8.25,-22.5 -8.75,-22 -9.375,-22 -9.75,-21.625 -9.75,-20 -10.25,-19.5 -15.5,-19.5 -17.25,-19.5 -18.125,-20.375 -21.875,-20.375
AGND on Bottom Layer "GND_AFE_BOT" (solid, pour order 41): -17.75,-14.625 -50,-14.625 -50,11.75 -37.5,11.75 -20,11.75 ccw(c-18.5,11.75) -18.5,10.25 ccw(c-18.5,11.75) -17.25,10.921 -17.25,9.5 -17.25,-14.125
AGND on Bottom Layer "GND_FG_BOT" (solid, pour order 40): -22.375,-20.875 -22.375,-24.125 -21.875,-24.625 -18.125,-24.625 -17.25,-25.5 -17.25,-27.5 -17,-27.75 -8.75,-27.75 -8.25,-27.25 -8.25,-22.5 -8.75,-22 -9.375,-22 -9.75,-21.625 -9.75,-20 -10.25,-19.5 -15.5,-19.5 -17.25,-19.5 -18.125,-20.375 -21.875,-20.375
AGND on Bottom Layer "GND_BOT" (solid, pour order 42): -11.25,-30.5 50,-30.5 50,-29.4 ccw(c48.5,-29.4) 48.5,-27.9 44,-27.9 cw(c44,-26.4) 42.5,-26.4 42.5,26.4 cw(c44,26.4) 44,27.9 48.5,27.9 ccw(c48.5,29.4) 50,29.4 50,37.9 -17,37.9 -17,-14.25 -17.625,-14.875 -50,-14.875 -50,-20.125 -50,-37.9 -14.25,-37.9 -14.25,-30.75 cw(c-12.75,-30.75) -12.75,-29.25 cw(c-12.75,-30.75) -11.25,-30.75 -11.25,-28 -17.125,-28 -17.5,-27.625 -17.5,-25.625 -18.25,-24.875 -22,-24.875 -22.625,-24.25 -22.625,-20.75 -22,-20.125 -18.25,-20.125 -17.375,-19.25 -10.125,-19.25 -9.512,-19.863 -9.512,-21.488 -9.25,-21.75 -8.625,-21.75 -8,-22.375 -8,-27.375 -8.625,-28 -11.25,-28
VDD_SCREEN on L2 "VDD_SCREEN_L2" (solid, pour order 34): 16.125,-9.25 16.125,-12.625 17.875,-12.625 18.75,-13.5 19.625,-14.375 23.75,-14.375 30.375,-14.375 30.375,-9.75 29.875,-9.25
VDD_RF_IO on L2 "VDD_RF_IO_L2" (solid, pour order 36): 0.125,-20.25 0.125,-27.25 0.625,-27.75 8.5,-27.75 9,-27.25 9,-24.25 9.5,-23.75 10.625,-23.75 12.625,-21.75 13.25,-21.75 15.25,-23.75 16.25,-23.75 16.75,-24.25 16.75,-27.25 17.25,-27.75 29.875,-27.75 30.375,-27.25 30.375,-14.625 19.5,-14.625 17.75,-12.875 11.875,-12.875 11.625,-13.125 10.75,-14 10.75,-16.25 11.25,-16.75 11.25,-21.625 11.125,-21.75 10.625,-22.25 9.125,-22.25 6,-22.25 5.375,-21.625 5.375,-20.75 4.875,-20.25 3.875,-20.25
VDD_RF_PW on L2 "VDD_RF_PW_L2" (solid, pour order 33): 0.125,-18.25 0.125,-16.875 0.625,-16.375 1.75,-16.375 10.5,-16.375 11,-16.875 11,-21.5 10.5,-22 6.125,-22 5.625,-21.5 5.625,-20.625 5,-20 0.125,-20 0.125,-19.5
VDD_AFE_A on L2 "VDD_AFE_A_L2" (solid, pour order 38): -21.5,-7.25 -21.5,-6.25 -20.875,-5.625 -19.125,-5.625 -17.75,-5.625 -17.25,-5.125 -17.25,-2.75 -17.75,-2.25 -20.875,-2.25 -21.5,-1.625 -21.5,4.875 -20.875,5.5 -17.25,5.5 -17.25,10.913 cw(c-18.518,11.794) -18.5,10.25 cw(c-18.517,11.733) -20,11.75 -50,11.75 -50,-14.625 -38.5,-14.625 -38.5,-10.75 -37.875,-10.125 -35,-10.125 -34.5,-9.625 -30,-9.625 -29.5,-10.125 -24.5,-10.125 -24,-9.625 -24,-7.875 -23.375,-7.25
VDD_AFE_D on L2 "VDD_AFE_D_L2" (solid, pour order 35): -21.5,-7.5 -21.5,-9 -21.5,-9.125 -20.875,-9.75 -20,-9.75 -17.75,-9.75 -17.25,-10.25 -17.25,-14.125 -17.75,-14.625 -38.25,-14.625 -38.25,-10.875 -37.75,-10.375 -34.875,-10.375 -34.375,-9.875 -30.125,-9.875 -29.625,-10.375 -24.375,-10.375 -23.75,-9.75 -23.75,-8 -23.25,-7.5
VSYS on L2 "VSYS_L2" (solid, pour order 37): -17.625,-14.875 -17,-14.25 -17,-10.125 -17.625,-9.5 -20.75,-9.5 -21.25,-9 -21.25,-6.375 -20.75,-5.875 -17.625,-5.875 -17,-5.25 -17,-2.625 -17.625,-2 -20.75,-2 -21.25,-1.5 -21.25,3.125 -21.25,4.75 -20.75,5.25 -12.5,5.25 -12,4.75 -12,-7.375 -11.375,-8 -8.375,-8 -7.875,-8.5 -7.875,-12.875 -7.25,-13.5 -3,-13.5 -1.125,-13.5 7.625,-13.5 9,-12.125 9,-11 9,-9.75 9.5,-9.25 15.875,-9.25 15.875,-11.75 15.875,-12.625 11.75,-12.625 10.5,-13.875 10.5,-16.125 10,-16.125 0.5,-16.125 -0.125,-16.75 -0.125,-27.25 -0.625,-27.75 -7.5,-27.75 -8,-27.25 -8,-22.375 -8.625,-21.75 -9.125,-21.75 -9.25,-21.75 -9.5,-21.5 -9.5,-19.875 -10.125,-19.25 -13.375,-19.25 -17.375,-19.25 -18.25,-20.125 -22,-20.125 -22.625,-20.75 -22.625,-21.75 -24.625,-21.75 -25.125,-22.25 -25.125,-23.375 -28.125,-23.375 -28.125,-20 -28.125,-14.875
VDD_MCU on L2 "VDD_MCU_L2" (solid, pour order 39): -7.625,-10.75 -7.625,-12.75 -7.125,-13.25 1.625,-13.25 7.5,-13.25 8.75,-12 8.75,-9.625 9.375,-9 15.5,-9 30,-9 30.625,-9.625 30.625,-17.25 30.625,-27.25 31.125,-27.75 43.375,-27.75 cw(c43.979,-26.4) 42.5,-26.4 42.5,26.4 cw(c44,26.4) 44,27.9 48.5,27.9 ccw(c48.5,29.4) 50,29.4 50,37.9 -17,37.9 -17,5.5 -12.375,5.5 -11.75,4.875 -11.75,-7.25 -11.25,-7.75 -8.25,-7.75 -7.625,-8.375

## Other copper
Top Layer:
  region net AGND: 14.5,-26.375 14.5,-25 15,-25.5 15,-26 15.375,-26.375
  region net BT_MLDO_OUT: 9.625,-24 10.5,-24 10.75,-24.25 10.5,-24.5 9.625,-24.5
  region net BT_ADC_LDO_OUT: 9.625,-23 10,-23 10.25,-23.25 10,-23.5 9.625,-23.5
  region net BT_CL1.5_LDO_OUT: 9.625,-22 10.375,-22 10.625,-22.25 10.375,-22.5 9.625,-22.5
  region net VDD_RF_PW: 10.5,-21.5 11,-21.5 11.625,-20.875 10.875,-20.875 10.5,-21.25
  region net VDD_RF_IO: 14.5,-15.2 14.825,-14.875 15.125,-14.875 15.125,-15 14.5,-15.625
  region net BT_SRAM_LDO_OUT: 12.875,-15.75 13.25,-15.375 13.25,-14.5 12.75,-14.5 12.75,-15 12.875,-15.125
  region net VDD_RF_IO: 16.875,-15.75 17.25,-15.375 17.25,-14.5 16.75,-14.5 16.75,-15 16.875,-15.125
  region net BT_DIG_LDO_OUT: 19,-17.125 19.625,-16.5 21.75,-16.5 21.75,-17 19.625,-17 19.25,-17.375 19.25,-17.875 19,-17.875
  region net AGND: 22.25,-18 21.25,-18 20.5,-18.75 20.75,-18.75 21.25,-18.75 21.5,-18.5 22.25,-18.5
  region net VDD_RF_IO: 22.25,-19.5 21,-19.5 20.625,-19.125 20.75,-19 22.25,-19
  region net VDD_RF_IO: 21.75,-22.5 21,-22.5 20.85,-22.65 20.5,-22.65 20.75,-22.4 20.75,-21.75 21,-22 21.75,-22
  region net VDD_RF_IO: 16.875,-24.75 17.25,-25.125 17.25,-26 16.75,-26 16.75,-25.5 16.875,-25.375
  region net BT_DIG_LDO_OUT: 15.75,-26 15.75,-25.125 16,-24.875 16.5,-24.875 16.25,-25.125 16.25,-26
  region net BT_DCO_LDO_OUT: 13.75,-26 13.75,-25.5 13.875,-25.375 13.875,-24.875 14,-25 14.25,-25.25 14.25,-26
  region net AGND: 26,-23.063 25.75,-23.063 25.563,-23.25 24.25,-23.25 24.25,-22.625 25.438,-22.625 25.75,-22.938 26,-22.938
  region net VDD_RF_IO: 26,-21.437 25.75,-21.437 25.563,-21.25 24.25,-21.25 24.25,-21.875 25.438,-21.875 25.75,-21.562 26,-21.562
  region net AGND: 35,-21.437 35.25,-21.437 35.438,-21.25 36.75,-21.25 36.75,-21.875 35.563,-21.875 35.25,-21.562 35,-21.562
  region net VDD_MCU: 35,-23.062 35.25,-23.062 35.438,-23.25 36.75,-23.25 36.75,-22.625 35.563,-22.625 35.25,-22.938 35,-22.938
  region net VDD_SCREEN: 19.25,-9.75 18.25,-9.75 17.875,-10.125 17.75,-10.125 17.75,-10.375 19.25,-10.375
  region net VSYS: 12.75,-9.75 13.75,-9.75 14.125,-10.125 14.25,-10.125 14.25,-10.375 12.75,-10.375
  region net VSYS: -20.125,-1.125 -20.125,0.25 -20.25,0.375 -20.25,1.5 -20.875,1.5 -20.875,0.375 -20.5,0 -20.5,-1.125
  region net VDD_AFE_A: -20.125,-2.875 -20.125,-4.25 -20.25,-4.375 -20.25,-5.5 -20.875,-5.5 -20.875,-4.375 -20.5,-4 -20.5,-2.875
  region net VSYS: -20.125,-8.625 -20.125,-7.25 -20.25,-7.125 -20.25,-6 -20.875,-6 -20.875,-7.125 -20.5,-7.5 -20.5,-8.625
  region net VDD_AFE_D: -20.125,-10.375 -20.125,-11.75 -20.25,-11.875 -20.25,-13 -20.875,-13 -20.875,-11.875 -20.5,-11.5 -20.5,-10.375
  region net VDD_RF_PW: 0.875,-17.125 2.25,-17.125 2.375,-17.25 3.5,-17.25 3.5,-17.875 2.375,-17.875 2,-17.5 0.875,-17.5
  region net VDD_RF_IO: 0.875,-20.875 2.25,-20.875 2.375,-21 3.5,-21 3.5,-21.625 2.375,-21.625 2,-21.25 0.875,-21.25
  region net VSYS: -0.875,-20.875 -2.25,-20.875 -2.375,-21 -3.5,-21 -3.5,-21.625 -2.375,-21.625 -2,-21.25 -0.875,-21.25
  region net VSYS: -0.875,-17.125 -2.25,-17.125 -2.375,-17.25 -3.5,-17.25 -3.5,-17.875 -2.375,-17.875 -2,-17.5 -0.875,-17.5
  region net VSYS: -8.625,-9.375 -10,-9.375 -10.125,-9.5 -11.25,-9.5 -11.25,-10.125 -10.125,-10.125 -9.75,-9.75 -8.625,-9.75
  region net VDD_MCU: -6.875,-9.375 -5.5,-9.375 -5.375,-9.5 -4.25,-9.5 -4.25,-10.125 -5.375,-10.125 -5.75,-9.75 -6.875,-9.75
  region net CHRG_IN: -37.75,-22.5 -38.875,-22.5 -39.062,-22.313 -40.438,-22.313 -40.438,-22.812 -39.438,-22.812 -39.125,-23.125 -37.75,-23.125
  region net VSYS: -29.25,-22.625 -28.875,-22.625 -28.625,-22.875 -28.25,-22.875 -28,-23.125 -26.75,-23.125 -26.75,-22.5 -27.875,-22.5 -28,-22.375 -29.25,-22.375
  region net CHRG_IN: -34.75,-22.625 -35.125,-22.625 -35.625,-23.125 -37.25,-23.125 -37.25,-22.5 -36.125,-22.5 -36,-22.375 -34.75,-22.375
  region net AGND: -30.125,-11.125 -29.875,-11.125 -29.625,-11.375 -26.75,-11.375 -26.75,-10.75 -29.75,-10.75 -29.875,-10.875 -30.125,-10.875
  region net VDD_AFE_D: -26.75,-12.75 -30.625,-12.75 -30.875,-12.5 -30.875,-11.5 -30.625,-11.5 -30.625,-11.875 -30.375,-12.125 -26.75,-12.125
  region net AGND: -38,-9.125 -37,-9.125 -36.875,-9 -36.875,-8.75 -36,-7.875 -35.75,-7.875 -35.75,-8.125 -35.875,-8.125 -36.125,-8.375 -36.125,-8.875 -37,-9.75 -38,-9.75
  region net VDD_AFE_A: -35.75,-7.375 -36.5,-7.375 -36.875,-7.75 -38,-7.75 -38,-8.375 -36.875,-8.375 -36.125,-7.625 -35.75,-7.625
  region net AGND: 14,-13.8 14.125,-13.8 14.125,-13.3 14.375,-13.3 14.375,-12.5 14.25,-12.375 13.75,-12.375 13.625,-12.5 13.625,-13.3 13.875,-13.3 13.875,-13.8
  pour cut-out: 13.375,-14.25 14.625,-14.25 14.625,-12.375 14.375,-12.125 13.625,-12.125 13.375,-12.375
  pour cut-out: 13.375,-27.125 13.625,-27.375 15.375,-27.375 15.625,-27.125 15.625,-25.75 14.638,-24.763 14.638,-22.988 14.613,-22.988 14.375,-22.75 14.125,-22.75 13.875,-23 13.875,-23.826 13.875,-24.875 13.375,-25.375
  region net AGND: 14,-26.7 14,-26.875 14.5,-26.875 14.5,-27.125 15.25,-27.125 15.375,-27 15.375,-26.375 14.5,-26.375 14.5,-26.625 14,-26.625
  pour cut-out: 11,-16.625 11.25,-16.625 11.25,-16.125 10.75,-15.625 10.75,-14.875 10.125,-14.25 7.875,-14.25 7.25,-14.875 7.25,-15.625 6.75,-16.125 6.75,-16.625 6.25,-17.125 6.25,-19.875 7.375,-21 10.625,-21 11.5,-20.125 13.375,-20.125 13.625,-19.875 13.625,-18.75 13.375,-18.5 11.875,-18.5 11.75,-18.375 11.75,-17.25 11.25,-16.75 11.25,-16.625 11,-16.625 11,-16.75 11.5,-17.25 11.5,-18.5 11.75,-18.75 13.25,-18.75 13.375,-18.875 13.375,-19.75 13.25,-19.875 11.375,-19.875 10.5,-20.75 7.5,-20.75 6.5,-19.75 6.5,-17.25 7,-16.75 7,-16.25 7.5,-15.75 7.5,-15 8,-14.5 10,-14.5 10.5,-15 10.5,-15.75 11,-16.25
  pour cut-out: 0.75,-8.875 0.75,-12 2,-13.25 7.5,-13.25 8.75,-12 8.75,-8.25 7.5,-7 6.125,-7 5.25,-6.125 5.25,-0.625 5,-0.375 4.5,-0.375 4.25,-0.625 4.25,-6.125 3.5,-6.875 3.375,-6.875 3.375,-6.625 4,-6 4,-0.5 4.375,-0.125 5.125,-0.125 5.5,-0.5 5.5,-6 6.25,-6.75 7.625,-6.75 9,-8.125 9,-12.125 7.625,-13.5 1.875,-13.5 0.5,-12.125 0.5,-8.75 1.5,-7.75 1.75,-7.75 1.75,-7.875
  pour cut-out: -4.5,-3.25 -2,-3.25 -1.5,-2.75 1.875,-2.75 2.25,-2.375 2.25,-0.625 2.5,-0.375 3,-0.375 3.25,-0.625 3.25,-3.375 2.875,-3.75 2.875,-3.875 3.125,-3.875 3.5,-3.5 3.5,-0.5 3.125,-0.125 2.375,-0.125 2,-0.5 2,-2.25 1.75,-2.5 -1.625,-2.5 -2.125,-3 -4.625,-3 -5.5,-3.875 -5.5,-7.625 -4.625,-8.5 -2.125,-8.5 -1.625,-9 0.625,-9 1.75,-7.875 1.75,-7.75 1.5,-7.75 0.5,-8.75 -1.5,-8.75 -2,-8.25 -4.5,-8.25 -5.25,-7.5 -5.25,-4
  pour cut-out: -38.5,-14.625 -38.25,-14.625 -38.25,-10.875 -37.75,-10.375 -34.875,-10.375 -34.375,-9.875 -30.125,-9.875 -29.625,-10.375 -24.375,-10.375 -23.75,-9.75 -23.75,-8 -23.25,-7.5 -19.875,-7.5 -19.375,-8 -19.25,-8 -19.25,-7.75 -19.75,-7.25 -23.375,-7.25 -24,-7.875 -24,-9.625 -24.5,-10.125 -29.5,-10.125 -30,-9.625 -34.5,-9.625 -35,-10.125 -37.875,-10.125 -38.5,-10.75
  region net VDD_MCU: -3.75,0.125 -4.375,0.125 -4.625,-0.125 -5.75,-0.125 -5.75,-0.75 -4.375,-0.75 -3.75,-0.125
  region net AGND: -3.75,0.375 -4.375,0.375 -4.625,0.625 -5.75,0.625 -5.75,1.25 -4.375,1.25 -3.75,0.625
  region net VDD_MCU: 9.625,-2.75 9.75,-2.875 9.75,-4.75 9.125,-4.75 9.125,-3.625 8.875,-3.375 8.875,-2.75 9.375,-2.75
  region net AGND: 7.875,-2.75 7.75,-2.875 7.75,-4.75 8.375,-4.75 8.375,-3.625 8.625,-3.375 8.625,-2.75
  region net AGND: 13.75,0.625 14.375,0.625 14.625,0.375 15.75,0.375 15.75,-0.25 14.375,-0.25 13.75,0.375
  region net VDD_MCU: 13.75,0.875 14.375,0.875 14.625,1.125 15.75,1.125 15.75,1.75 14.375,1.75 13.75,1.125
  region net VDD_MCU: 13.75,11.875 14.75,12.875 17.25,12.875 17.25,13.5 14.75,13.5 13.625,12.375 13.625,12 13.625,11.875
  region net AGND: 13.75,11.375 14.5,11.375 14.625,11.5 17.25,11.5 17.25,12.125 14.375,12.125 13.75,11.5
  region net VDD_MCU: -1.125,14.75 -1.125,14.875 -2,15.75 -2,16.25 -1.375,16.25 -1.375,15.75 -0.875,15.25 -0.875,14.75
  region net AGND: -0.375,14.75 0,15.125 0,16.25 -0.625,16.25 -0.625,14.75
  pour cut-out: -35.9,-2.3 -35.9,-4.7 -28.1,-4.7 -28.1,-2.3
L1:
  pour cut-out: -38.5,-14.625 -38.25,-14.625 -38.25,-10.875 -37.75,-10.375 -34.875,-10.375 -34.375,-9.875 -30.125,-9.875 -29.625,-10.375 -24.375,-10.375 -23.75,-9.75 -23.75,-8 -23.25,-7.5 -19.875,-7.5 -19.375,-8 -19.25,-8 -19.25,-7.75 -19.75,-7.25 -23.375,-7.25 -24,-7.875 -24,-9.625 -24.5,-10.125 -29.5,-10.125 -30,-9.625 -34.5,-9.625 -35,-10.125 -37.875,-10.125 -38.5,-10.75
  pour cut-out: -35.9,-2.3 -35.9,-4.7 -28.1,-4.7 -28.1,-2.3
  pour cut-out: -4.5,-3.25 -2,-3.25 -1.5,-2.75 1.875,-2.75 2.25,-2.375 2.25,-0.625 2.5,-0.375 3,-0.375 3.25,-0.625 3.25,-2.75 3.5,-2.75 3.5,-0.5 3.125,-0.125 2.375,-0.125 2,-0.5 2,-2.25 1.75,-2.5 -1.625,-2.5 -2.125,-3 -4.625,-3 -5.5,-3.875 -5.5,-7.625 -4.625,-8.5 -2.125,-8.5 -1.625,-9 0.625,-9 1.75,-7.875 1.75,-7.75 1.5,-7.75 0.5,-8.75 -1.5,-8.75 -2,-8.25 -4.5,-8.25 -5.25,-7.5 -5.25,-4
  pour cut-out: 0.75,-8.875 0.75,-12 2,-13.25 7.5,-13.25 8.75,-12 8.75,-8.25 7.5,-7 6.125,-7 5.25,-6.125 5.25,-0.625 5,-0.375 4.5,-0.375 4.25,-0.625 4.25,-6.125 3.5,-6.875 3.375,-6.875 3.375,-6.625 4,-6 4,-0.5 4.375,-0.125 5.125,-0.125 5.5,-0.5 5.5,-6 6.25,-6.75 7.625,-6.75 9,-8.125 9,-12.125 7.625,-13.5 1.875,-13.5 0.5,-12.125 0.5,-8.75 1.5,-7.75 1.75,-7.75 1.75,-7.875
  pour cut-out: 11,-16.625 11.25,-16.625 11.25,-16.125 10.75,-15.625 10.75,-14.875 10.125,-14.25 7.875,-14.25 7.25,-14.875 7.25,-15.625 6.75,-16.125 6.75,-16.625 6.25,-17.125 6.25,-19.875 7.375,-21 10.625,-21 11.5,-20.125 13.375,-20.125 13.625,-19.875 13.625,-18.75 13.375,-18.5 11.875,-18.5 11.75,-18.375 11.5,-18.375 11.5,-18.5 11.75,-18.75 13.25,-18.75 13.375,-18.875 13.375,-19.75 13.25,-19.875 11.375,-19.875 10.5,-20.75 7.5,-20.75 6.5,-19.75 6.5,-17.25 7,-16.75 7,-16.25 7.5,-15.75 7.5,-15 8,-14.5 10,-14.5 10.5,-15 10.5,-15.75 11,-16.25
L2:
  pour cut-out: -35.9,-2.3 -35.9,-4.7 -28.1,-4.7 -28.1,-2.3
Bottom Layer:
  pour cut-out: 11,-16.625 11.25,-16.625 11.25,-16.125 10.75,-15.625 10.75,-14.875 10.125,-14.25 7.875,-14.25 7.25,-14.875 7.25,-15.625 6.75,-16.125 6.75,-16.625 6.25,-17.125 6.25,-19.875 7.375,-21 10.625,-21 11.5,-20.125 13.375,-20.125 13.625,-19.875 13.625,-18.75 13.375,-18.5 11.875,-18.5 11.75,-18.375 11.75,-17.25 11.25,-16.75 11.25,-16.625 11,-16.625 11,-16.75 11.5,-17.25 11.5,-18.5 11.75,-18.75 13.25,-18.75 13.375,-18.875 13.375,-19.75 13.25,-19.875 11.375,-19.875 10.5,-20.75 7.5,-20.75 6.5,-19.75 6.5,-17.25 7,-16.75 7,-16.25 7.5,-15.75 7.5,-15 8,-14.5 10,-14.5 10.5,-15 10.5,-15.75 11,-16.25
  pour cut-out: 0.75,-8.875 0.75,-12 2,-13.25 7.5,-13.25 8.75,-12 8.75,-8.25 7.5,-7 6.125,-7 5.25,-6.125 5.25,-0.625 5,-0.375 4.5,-0.375 4.25,-0.625 4.25,-6.125 3.5,-6.875 3.375,-6.875 3.375,-6.625 4,-6 4,-0.5 4.375,-0.125 5.125,-0.125 5.5,-0.5 5.5,-6 6.25,-6.75 7.625,-6.75 9,-8.125 9,-12.125 7.625,-13.5 1.875,-13.5 0.5,-12.125 0.5,-8.75 1.5,-7.75 2.625,-6.625 3.375,-6.625 3.375,-6.875 2.75,-6.875
  pour cut-out: -4.5,-3.25 -2,-3.25 -1.5,-2.75 1.875,-2.75 2.25,-2.375 2.25,-0.625 2.5,-0.375 3,-0.375 3.25,-0.625 3.25,-3.375 2.5,-4.125 2.5,-6.75 1.5,-7.75 1.875,-7.75 2.75,-6.875 2.75,-4.125 3.5,-3.5 3.5,-0.5 3.125,-0.125 2.375,-0.125 2,-0.5 2,-2.25 1.75,-2.5 -1.625,-2.5 -2.125,-3 -4.625,-3 -5.5,-3.875 -5.5,-7.625 -4.625,-8.5 -2.125,-8.5 -1.625,-9 0.625,-9 1.875,-7.75 1.5,-7.75 0.5,-8.75 -1.5,-8.75 -2,-8.25 -4.5,-8.25 -5.25,-7.5 -5.25,-4
  pour cut-out: -38.5,-14.625 -38.25,-14.625 -38.25,-10.875 -37.75,-10.375 -34.875,-10.375 -34.375,-9.875 -30.125,-9.875 -29.625,-10.375 -24.375,-10.375 -23.75,-9.75 -23.75,-8 -23.25,-7.5 -19.875,-7.5 -19.375,-8 -19.25,-8 -19.25,-7.75 -19.75,-7.25 -23.375,-7.25 -24,-7.875 -24,-9.625 -24.5,-10.125 -29.5,-10.125 -30,-9.625 -34.5,-9.625 -35,-10.125 -37.875,-10.125 -38.5,-10.75
  pour cut-out: -35.9,-2.3 -35.9,-4.7 -28.1,-4.7 -28.1,-2.3

## Silkscreen, mask and mechanical layers (free items; w line width, h text height)
Top Overlay:
  drawing of 97 lines, arcs and shapes, not listed
  text "WAKEUP" at 26.244,30.68 h1
  text "BUZZER" at -2.43,27.618 h1 r90
  text "PEN" at 21.472,23.18 h1
  text "BUSY" at 20.755,22.18 h1
  text "MISO" at 20.987,21.18 h1
  text "NRST" at 11.327,20.936 h1
  text "MOSI" at 21.01,20.18 h1
  text "SCLK" at 20.773,19.18 h1
  text "LL" at -39.4,19 h2 r90
  text "LA" at -24.4,18.752 h2 r90
  text "RA" at -31.9,18.547 h2 r90
  text "CTS" at 3.077,18.43 h1
  text "TP" at 20,18.187 h1.5 r90
  text "CS" at 22.018,18.18 h1
  text "RTS" at 3.077,17.43 h1
  text "TX" at 0.802,16.43 h1
  text "RX" at 4.077,16.43 h1
  text "electrode" at -38.35,16.103 h1.25 r90
  text "electrode" at -30.85,16.103 h1.25 r90
  text "electrode" at -23.35,16.103 h1.25 r90
  text "CLK" at 1.13,15.43 h1
  text "NSHUTD" at 5.077,15.43 h1
  text "RF" at 10.875,15.438 h1.5 r90
  text "V MCU" at -12.936,10.827 h1 r90
  text "v1.0" at 39.5,5.5 h2 r90
  text "AFE" at -17.063,4.25 h1.5
  text "V AFE A" at -23.686,3.077 h1 r90
  text "V AFE A EN" at -18.186,3.077 h1 r90
  text "SCLK" at -14.43,1.577 h1 r90
  text "CS" at -13.43,0.577 h1 r90
  text "DIN" at -14.43,-1.98 h1 r90
  text "DRDY" at -16.43,-2.044 h1 r90
  text "DOUT" at -15.43,-2.025 h1 r90
  text "RESET" at -12.43,-4.474 h1 r90
  text "START" at -13.43,-4.507 h1 r90
  text "V SCREEN EN" at 15.577,-5.564 h1
  text "V AFE D EN" at -16.423,-6.064 h1
  text "SC" at 20.688,-8 h1.5
  text "NWE" at 21.197,-8.82 h1
  text "NOE" at 21.346,-9.82 h1
  text "A16" at 21.564,-10.82 h1
  text "NE1" at 21.646,-11.82 h1
  text "V SCREEN" at 15.862,-13.07 h1
  text "Persimmon" at 37.5,-13.5 h4 r90
  text "H2H Main Board" at 39.5,-13.5 h2 r90
  text "V RF PW EN" at -6.222,-14.07 h1
  text "V RF PW" at 5.314,-17.173 h1 r90
  text "V SYS" at -23.436,-17.673 h1 r90
  text "PG" at -35.18,-18.173 h1 r90
  text "CHG" at -34.18,-18.173 h1 r90
  text "JACK" at -33.18,-18.173 h1 r90
  text "V AFE D" at -28.93,-18.31 h1 r90
  text "CHRG" at -36.5,-19.062 h1.5 r90
  text "FG" at -9.313,-20 h1.5
  text "CHRG INPUT" at -46.828,-20.57 h1
  text "SDA" at -8.423,-20.82 h1
  text "SCL" at -8.423,-21.82 h1
  text "GPOUT" at -7.68,-26.195 h1 r90
  text "V RF IO" at 5.32,-26.27 h1 r90
  text "V RF IO EN" at -5.726,-26.82 h1
  text "CHRG+" at -44.4,-28.07 h1
  text "PACK+" at -22.673,-28.064 h1
  text "GND" at -43.226,-31.57 h1
Bottom Overlay:
  region: -46,28 -46.5,28 -46.25,27.5 -46.75,27.25 -46.25,26.25 -46.25,27 -45.75,27.25
  region: -48.5,14.5 -49,14.5 -48.75,14 -49.25,13.75 -48.75,12.75 -48.75,13.5 -48.25,13.75
  region: -48.5,28 -49,28 -48.75,27.5 -49.25,27.25 -48.75,26.25 -48.75,27 -48.25,27.25
  region: -47.25,28 -47.75,28 -47.5,27.5 -48,27.25 -47.5,26.25 -47.5,27 -47,27.25
  lines w0.125: -47.275,32 -46.775,31.5 ; -45.155,-32.878 -45.155,-32.171 ; 2.25,27.75 2.25,26.75 7.75,26.75 7.75,27.5 ; 2.25,35 2.25,35.75 ; 7.75,35 7.75,35.75 ; 46.775,-31.5 47.275,-32
  lines w0.15: -48.025,31.5 -47.525,32 -47.525,30.5 ; -47.275,30.5 -47.275,32 ; -45.155,-32.878 -44.094,-31.817 ; -44.271,-33.055 -44.978,-33.055 -43.918,-31.994 ; 47.275,-32 47.275,-30.5 ; 47.525,-30.5 47.525,-32 48.025,-31.5
  lines w0.2: -49.875,11.75 -20.125,11.75 ; -49.875,25.25 -20.125,25.25 ; -41.25,32.75 -41.25,34 -41,34 ; -38,34 -37.75,34 -37.75,32.75 ; -33.75,32.75 -33.75,34 -33.5,34 ; -30.5,34 -30.25,34 -30.25,32.75 ; -26.25,32.75 -26.25,34 -26,34 ; -23,34 -22.75,34 -22.75,32.75
  text "JTAG" at 7.812,35.75 h1.5
  text "LL" at -38.503,33.5 h2
  text "RA" at -30.777,33.5 h2
  text "LA" at -23.379,33.5 h2
  text "Persimmon" at 43.5,32.5 h5
  text "JTMS" at 2.14,32.42 h1 r270
  text "JTCK" at 3.41,32.42 h1 r270
  text "JTDO" at 4.68,32.42 h1 r270
  text "JTDI" at 5.95,32.42 h1 r270
  text "NRST" at 7.22,32.42 h1 r270
  text "H2H Main Board" at 43.5,30 h2.5
  text "VCC" at 2.18,27.809 h1 r270
  text "GND" at 3.45,27.751 h1 r270
  text "GND" at 4.72,27.751 h1 r270
  text "GND" at 7.26,27.751 h1 r270
  text "Defibrillator voltages (up to 5000 V)" at -22.25,27.5 h1.5
  text "RTCK" at 5.93,27.235 h1 r270
  text "may be present" at -34.852,26.25 h1.5
  text "b-105" at 43.5,-32.5 h5
  text "Samuel López Asunción" at 12.863,-34.5 h2
  text "Failure is not" at 43.5,-34.5 h2
  text "Tomás Valencia Noheda" at 13,-36.5 h2
  text "an option" at 43.5,-36.5 h2
Mechanical 1:
  the board outline again, w0.2